# EAGLE board Syn-ShieldCarger-v01 (EAGLE 5.10)
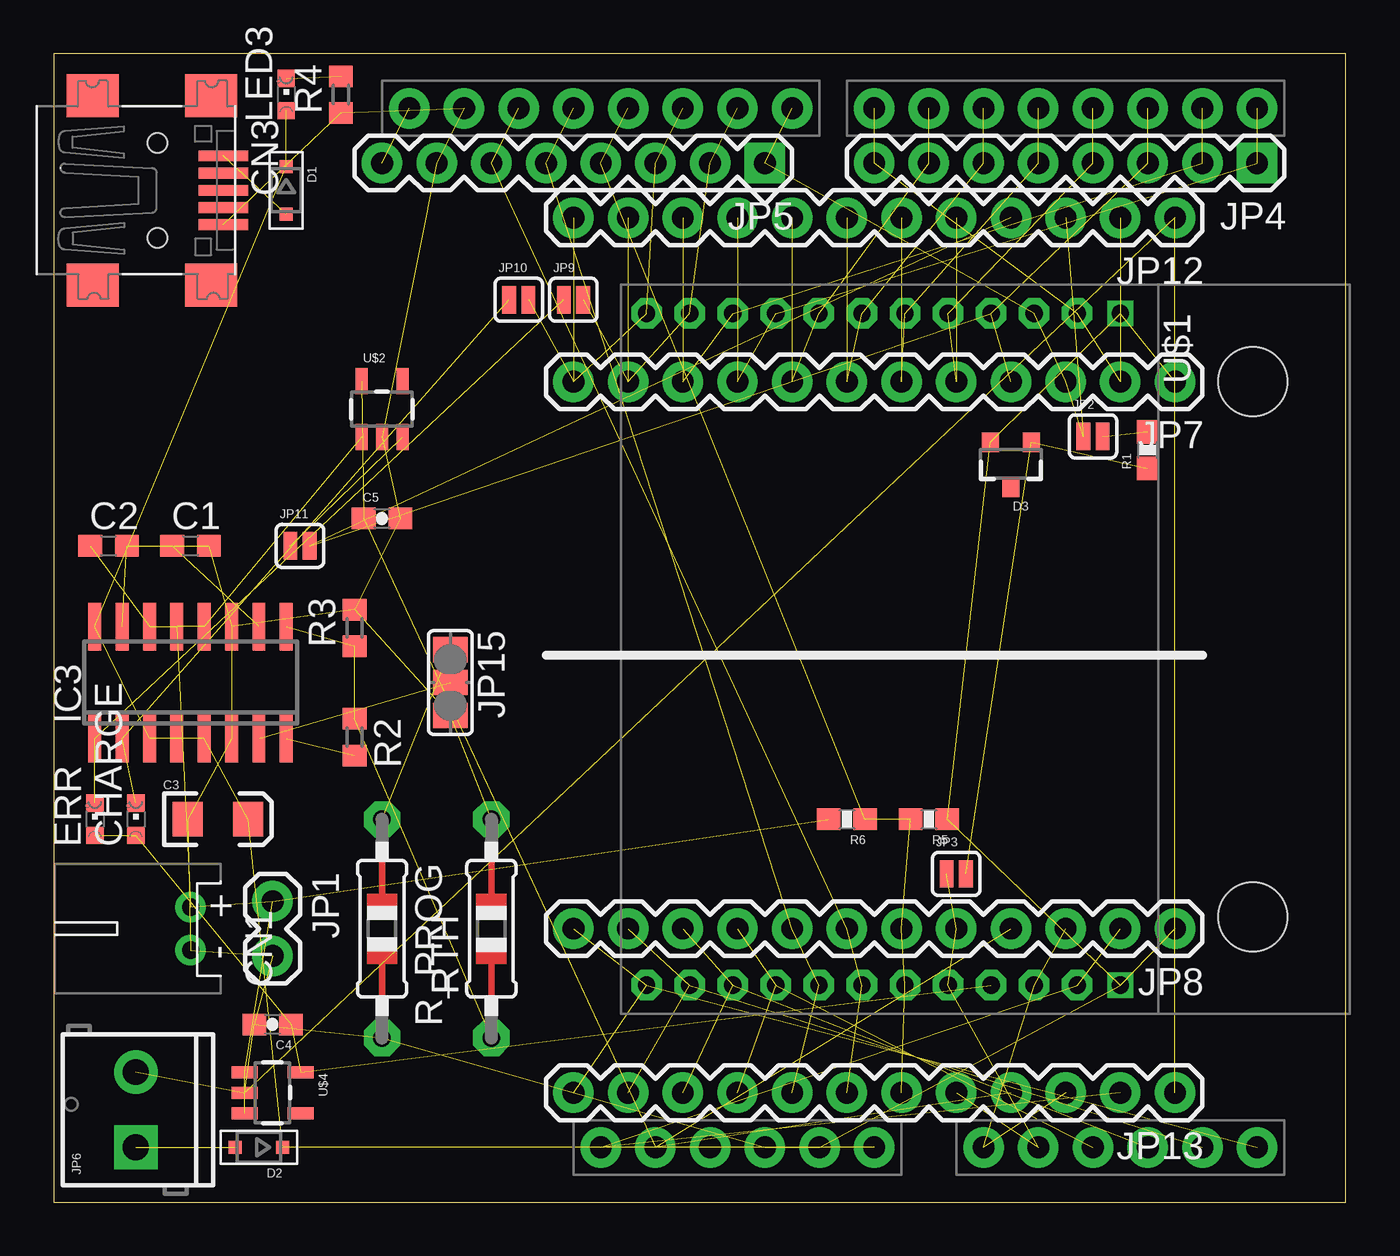
[diagram p0: board, top side]
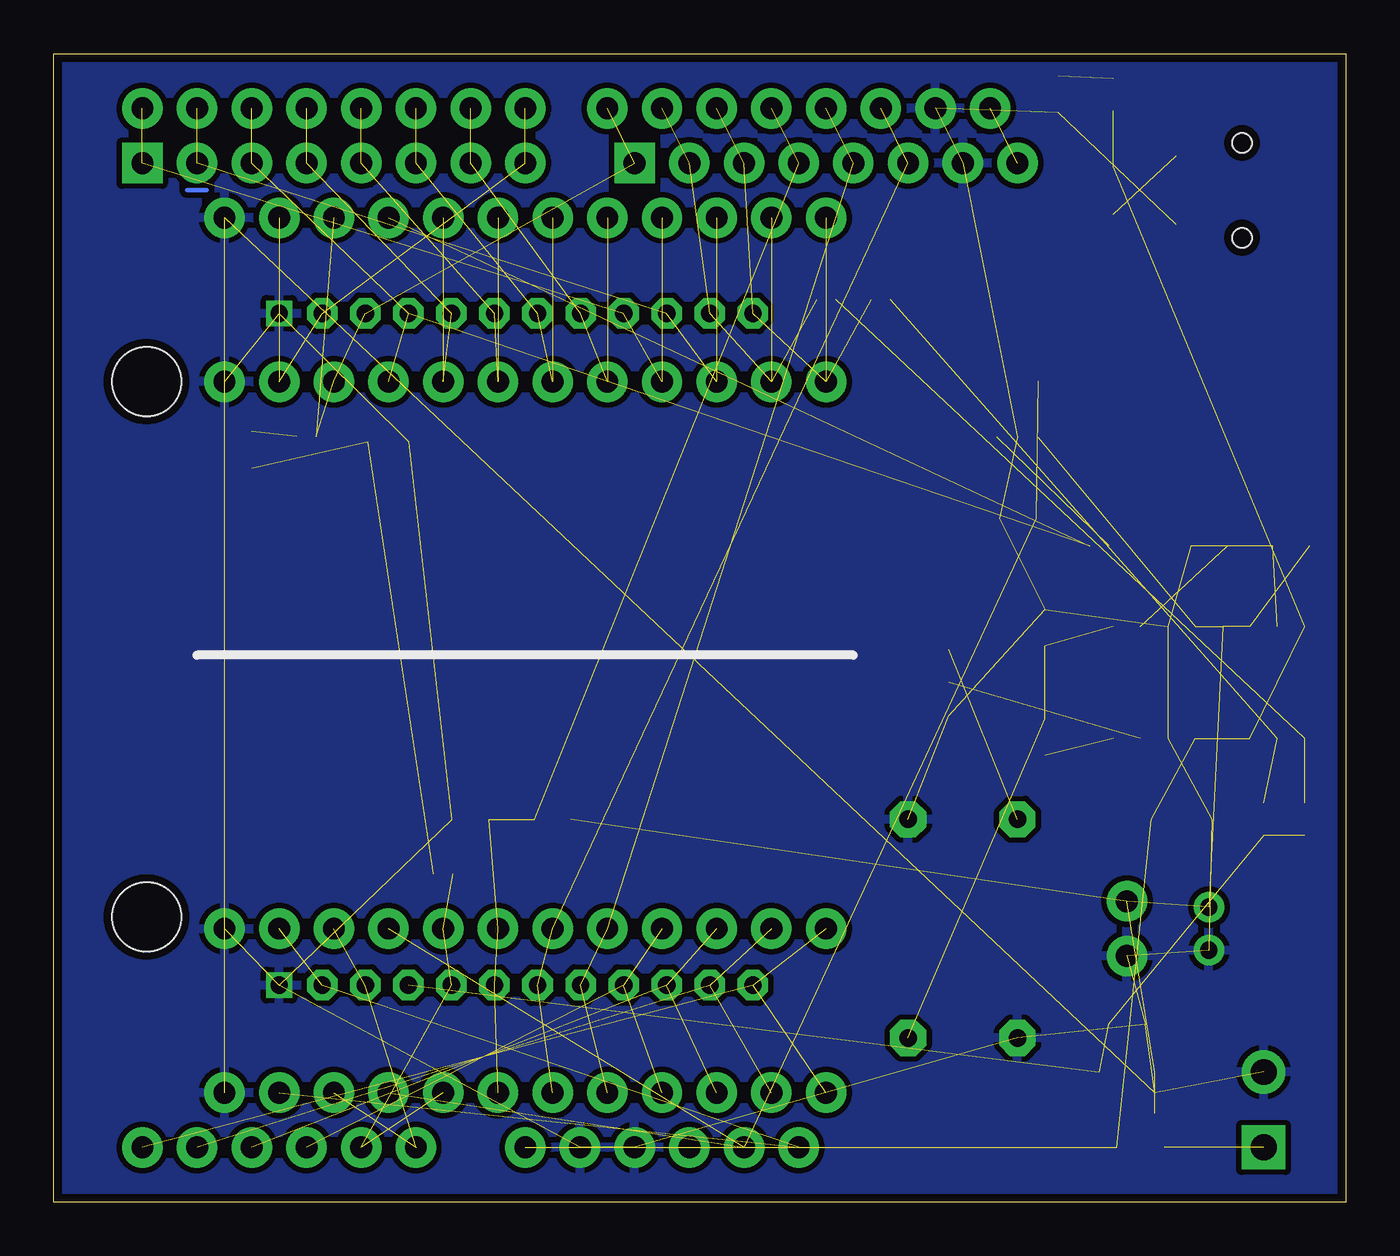
[diagram p1: board, bottom side, seen from below]

Size 59.99 x 53.33 mm. Coordinates in mm from the lower left corner, seen from the top.
Outline: 0,0 59.99,0 59.99,53.33 0,53.33 0,0
Copper layers (1*16): Top 0.0356mm / dielectric 1.5011mm / Bottom 0.0356mm
Design rules "LaenPCBOrder *": minimum track width 10mil, minimum drill 13mil, track to track 10mil, track to pad 6mil, pad to pad 6mil, via to via 6mil, smd to smd 6mil, copper to edge 15mil, drill to drill 6mil, minimum pad ring 7mil, minimum via ring 7mil, stop-mask expansion 4mil, vias tented up to drill 0mil, thermal gap 10mil

## Footprints (pad centres in the part's own frame; a part is rotated, then mirrored left to right if it is on the bottom)
C0603 = smd 1.1 x 1: 1 -0.85,0; 2 0.85,0
EIA3216 = smd 1.4 x 1.6: A 1.4,0; C -1.4,0
0603-CAP = smd 1.1 x 1: 1 -0.85,0; 2 0.85,0
CHIPLED_0603 = smd 0.8 x 0.8: A 0,-0.75; C 0,0.75
JST-PH-2-THM-RA = drill 0.8 pad 1.422 round: 1 1,0; 2 -1,0
USB-MINIB = smd 0.5 x 2.308: D+ 0,4.064; D- -0.8,4.064; GND 1.6,4.064; ID 0.8,4.064; VBUS -1.6,4.064 | smd 2 x 2.4: GND1 -4.4,-2; GND2 -4.4,3.5; GND3 4.4,3.5; GND4 4.4,-2 | hole 0.9: -2.2,1; 2.2,1
SOD-323 = smd 0.6 x 0.6: A 1.1,0; C -1.1,0
SOT23-3 = smd 0.8 x 0.9: 1 -0.95,-1; 2 0.95,-1; 3 0,1.1
SO16 = smd 0.6 x 2.2: 1 -4.445,-2.6; 2 -3.175,-2.6; 3 -1.905,-2.6; 4 -0.635,-2.6; 5 0.635,-2.6; 6 1.905,-2.6; 7 3.175,-2.6; 8 4.445,-2.6; 9 4.445,2.6; 10 3.175,2.6; 11 1.905,2.6; 12 0.635,2.6; 13 -0.635,2.6; 14 -1.905,2.6; 15 -3.175,2.6; 16 -4.445,2.6
1X02 = drill 1.016 pad 1.88 round: 1 0,0; 2 2.54,0
SJ_2S = smd 0.635 x 1.27: 1 -0.45,0; 2 0.45,0
1X08 = drill 1.016 pad 1.88 square: 1 0,0 | drill 1.016 pad 1.88 round: 2 2.54,0; 3 5.08,0; 4 7.62,0; 5 10.16,0; 6 12.7,0; 7 15.24,0; 8 17.78,0
SCREWTERMINAL-3.5MM-2 = drill 1.2 pad 2.032 square: 1 0,0 | drill 1.2 pad 2.032 round: 2 3.5,0
1X12 = drill 1.016 pad 1.88 round: 1 0,0; 2 2.54,0; 3 5.08,0; 4 7.62,0; 5 10.16,0; 6 12.7,0; 7 15.24,0; 8 17.78,0; 9 20.32,0; 10 22.86,0; 11 25.4,0; 12 27.94,0
SJ_2 = smd 1.168 x 1.6: 1 -1.524,0; 2 0,0; 3 1.524,0
0603-RES = smd 1.1 x 1: 1 -0.85,0; 2 0.85,0
R0603 = smd 1 x 1.1: 1 -0.85,0; 2 0.85,0
0805-THM = drill 0.813 pad 1.676 octagon: 1 -5.08,0; 2 5.08,0
DUEMILANOVE_VIAS = drill 1.016 pad 1.88 round: 3.3V 50.8,13.97; 5V 50.8,16.51; A0 50.8,29.21; A1 50.8,31.75; A2 50.8,34.29; A3 50.8,36.83; A4 50.8,39.37; A5 50.8,41.91; AREF 2.54,2.54; D2 2.54,36.83; D3 2.54,34.29; D4 2.54,31.75; D5 2.54,29.21; D6 2.54,26.67; D7 2.54,24.13; D8 2.54,20.32; D9 2.54,17.78; D10 2.54,15.24; D11 2.54,12.7; D12 2.54,10.16; D13 2.54,7.62; GND@0 50.8,19.05; GND@1 50.8,21.59; GND@2 2.54,5.08; RES 50.8,11.43; RX 2.54,41.91; TX 2.54,39.37; VIN 50.8,24.13
SYNAPSERF100 = drill 0.8 square: 1 0,0; 24 31.2,0 | drill 0.8 pad 1.422 octagon: 2 0,-2; 3 0,-4; 4 0,-6; 5 0,-8; 6 0,-10; 7 0,-12; 8 0,-14; 9 0,-16; 10 0,-18; 11 0,-20; 12 0,-22; 13 31.2,-22; 14 31.2,-20; 15 31.2,-18; 16 31.2,-16; 17 31.2,-14; 18 31.2,-12; 19 31.2,-10; 20 31.2,-8; 21 31.2,-6; 22 31.2,-4; 23 31.2,-2 | hole 3.2: 3.17,6.16; 28.03,6.16
SOT23-5 = smd 0.55 x 1.2: 1 -0.95,-1.3; 2 0,-1.3; 3 0.95,-1.3; 4 0.95,1.3; 5 -0.95,1.3

## Placement (x,y rotation side)
C1  0.47uF  [C0603]  6.35,30.48 0 top
C2  10uF  [C0603]  2.54,30.48 0 top
C3  10uF  [EIA3216]  7.62,17.78 0 top
C4  1uF  [0603-CAP]  10.16,8.26 180 top
C5  1uF  [0603-CAP]  15.24,31.75 0 top
CHARGE  ORG  [CHIPLED_0603]  3.81,17.78 0 top
CN1  [JST-PH-2-THM-RA]  6.35,12.7 90 top
CN3  [USB-MINIB]  3.81,46.99 270 top
D1  [SOD-323]  10.79,46.99 270 top
D2  [SOD-323]  9.53,2.54 180 top
D3  ADR510  [SOT23-3]  44.45,34.29 180 top
ERR  RED  [CHIPLED_0603]  1.91,17.78 0 top
IC3  [SO16]  6.35,24.13 0 top
JP1  [1X02]  10.16,13.97 270 top
JP2  [SJ_2S]  48.26,35.56 0 top
JP3  [SJ_2S]  41.91,15.24 0 top
JP4  [1X08]  55.88,48.26 180 top
JP5  [1X08]  33.02,48.26 180 top
JP6  [SCREWTERMINAL-3.5MM-2]  3.81,2.54 90 top
JP7  M12PTH  [1X12]  52.07,38.1 180 top
JP8  M12PTH  [1X12]  52.07,12.7 180 top
JP9  [SJ_2S]  24.13,41.91 0 top
JP10  [SJ_2S]  21.59,41.91 0 top
JP11  [SJ_2S]  11.43,30.48 0 top
JP12  M12PTH  [1X12]  52.07,45.72 180 top
JP13  M12PTH  [1X12]  52.07,5.08 180 top
JP15  [SJ_2]  18.41,24.13 270 top
LED3  [CHIPLED_0603]  10.79,51.44 0 top
R1  10K  [0603-RES]  50.8,34.92 90 top
R2  6.19K  [R0603]  13.97,21.59 270 top
R3  7.3K  [R0603]  13.97,26.67 90 top
R4  1K  [R0603]  13.34,51.44 90 top
R5  1M  [0603-RES]  40.64,17.78 180 top
R6  1M  [0603-RES]  36.83,17.78 180 top
R_PROG  [0805-THM]  15.24,12.7 270 top
RTH  10K @ 25degC  [0805-THM]  20.32,12.7 90 top
U1  ARDUINO_SHIELDNO_SILK  [DUEMILANOVE_VIAS]  13.97,53.34 270 top
U$1  SYNAPSEWIRELESS-RFENGINESTD  [SYNAPSERF100]  49.53,41.27 270 top
U$2  MCP1802  [SOT23-5]  15.24,36.83 0 top
U$4  MCP1802  [SOT23-5]  10.16,5.08 270 top

## Library data of the parts
C1 C2 CHARGE CN1 CN3 D1 D2 ERR IC3 LED3 R2-R4 R_PROG RTH = adafruit
C3-C5 JP1-JP13 JP15 R1 R5 R6 U1 = SparkFun
D3 U$2 U$4 = 0_jc-modified
U$1 = 0_jc-custom

## Nets
A1_18: JP3.1 JP8.5 JP13.5 U1.A1 U$1.20
A2_14: JP8.9 JP13.9 U1.A2 U$1.16
A3_13: JP8.10 JP13.10 U1.A3 U$1.15
A4_12: JP8.11 JP13.11 U1.A4 U$1.14
A5_11: JP8.12 JP13.12 U1.A5 U$1.13
ADC0: JP8.3 JP13.3 U1.A0 U$1.22
AREF: JP5.8 U1.AREF
AUX_SHDN: JP11.1 U$2.3
D2_2: JP4.3 JP7.4 JP11.2 JP12.4 U1.D2 U$1.4
D3_3: JP4.4 JP7.5 JP12.5 U1.D3 U$1.5
D4_4: JP4.5 JP7.6 JP12.6 U1.D4 U$1.6
D5_5: JP4.6 JP7.7 JP12.7 U1.D5 U$1.7
D6_6: JP4.7 JP7.8 JP12.8 U1.D6 U$1.8
D7_0: JP4.8 JP7.2 JP12.2 U1.D7 U$1.2
D8_1: JP2.1 JP5.1 JP7.3 JP12.3 U1.D8 U$1.3
D9_9: JP5.2 JP7.11 JP9.2 JP12.11 U1.D9 U$1.11
D10_10: JP5.3 JP7.12 JP10.2 JP12.12 U1.D10 U$1.12
D11_17: JP5.4 JP8.6 JP13.6 R5.2 R6.1 U1.D11 U$1.19
D12_15: JP5.5 JP8.8 JP13.8 U1.D12 U$1.17
D13_16: JP5.6 JP8.7 JP13.7 U1.D13 U$1.18
GND: C1.2 C2.2 C3.C C4.2 C5.2 CN1.2 CN3.GND D3.2 IC3.6 IC3.11 IC3.15 JP1.2 JP5.7 JP6.2 JP7.1 JP8.1 JP12.1 JP13.1 JP15.3 R3.2 R4.1 R5.1 R_PROG.2 RTH.2 U1.GND@0 U1.GND@1 U1.GND@2 U$1.1 U$1.24 U$2.2 U$4.2
MPROG: IC3.7 JP15.2
N$2: LED3.C R4.2
N$3: D3.1 JP3.2 R1.1
N$4: JP2.2 R1.2
N$7: IC3.8 R2.2
N$8: IC3.9 R2.1 R3.1 RTH.1
N$9: C1.1 IC3.10
N$11: JP15.1 R_PROG.1
N$21: CN3.VBUS D1.A
N$55: U1.5V
RESET: JP8.2 JP13.2 U1.RES U$1.23
RX_7: JP4.1 JP7.9 JP12.9 U1.RX U$1.9
STAT1: CHARGE.C IC3.2 JP10.1
STAT2: ERR.C IC3.1 JP9.1
TX_8: JP4.2 JP7.10 JP12.10 U1.TX U$1.10
VBAT+: C2.1 CN1.1 IC3.12 IC3.13 IC3.14 JP1.1 R6.2 U$2.1 U$4.1 U$4.3
VCC3: C4.1 CHARGE.A ERR.A U$1.21 U$4.5
VCC3_AUX: C5.1 JP8.4 JP13.4 U1.3.3V U$2.5
VIN: C3.A D1.C D2.C IC3.3 IC3.4 IC3.5 IC3.16 LED3.A U1.VIN
VINJ: D2.A JP6.1

## Tracks (layer width: path | path; a pad name or v marks a point on that pad's centre or on a via)
A1_18  (4 unrouted)
A2_14  (3 unrouted)
A3_13  (3 unrouted)
A4_12  (3 unrouted)
A5_11  (3 unrouted)
ADC0  (3 unrouted)
AREF  (1 unrouted)
AUX_SHDN  (1 unrouted)
D2_2  (5 unrouted)
D3_3  (4 unrouted)
D4_4  (4 unrouted)
D5_5  (4 unrouted)
D6_6  (4 unrouted)
D7_0  (4 unrouted)
D8_1  (5 unrouted)
D9_9  (5 unrouted)
D10_10  (5 unrouted)
D11_17  (6 unrouted)
D12_15  (4 unrouted)
D13_16  (4 unrouted)
GND  (30 unrouted)
  pour Bottom (isolate 0.254): 0,53.34 59.69,53.34 59.69,0 0,0
MPROG  (1 unrouted)
N$2  (1 unrouted)
N$3  (2 unrouted)
N$4  (1 unrouted)
N$7  (1 unrouted)
N$8  (3 unrouted)
N$9  (1 unrouted)
N$11  (1 unrouted)
N$21  (1 unrouted)
N$23
  Bottom 0.203: 52.89,46.99 53.79,46.99
RESET  (3 unrouted)
RX_7  (4 unrouted)
STAT1  (2 unrouted)
STAT2  (2 unrouted)
TX_8  (4 unrouted)
VBAT+  (9 unrouted)
VCC3  (4 unrouted)
VCC3_AUX  (4 unrouted)
VIN  (8 unrouted)
VINJ  (1 unrouted)